# Altium PCB PCB_Arithmetic Logic Unit_2021-10-05.pcbdoc
Units mm, origin at the board's own origin, x right, y up, seen from the top; angles counter-clockwise.
Board outline 236.59 x 324.34 mm, 2 copper layers (Top Layer, Bottom Layer); 59 components, 103 nets, 364 pads, 139 vias.
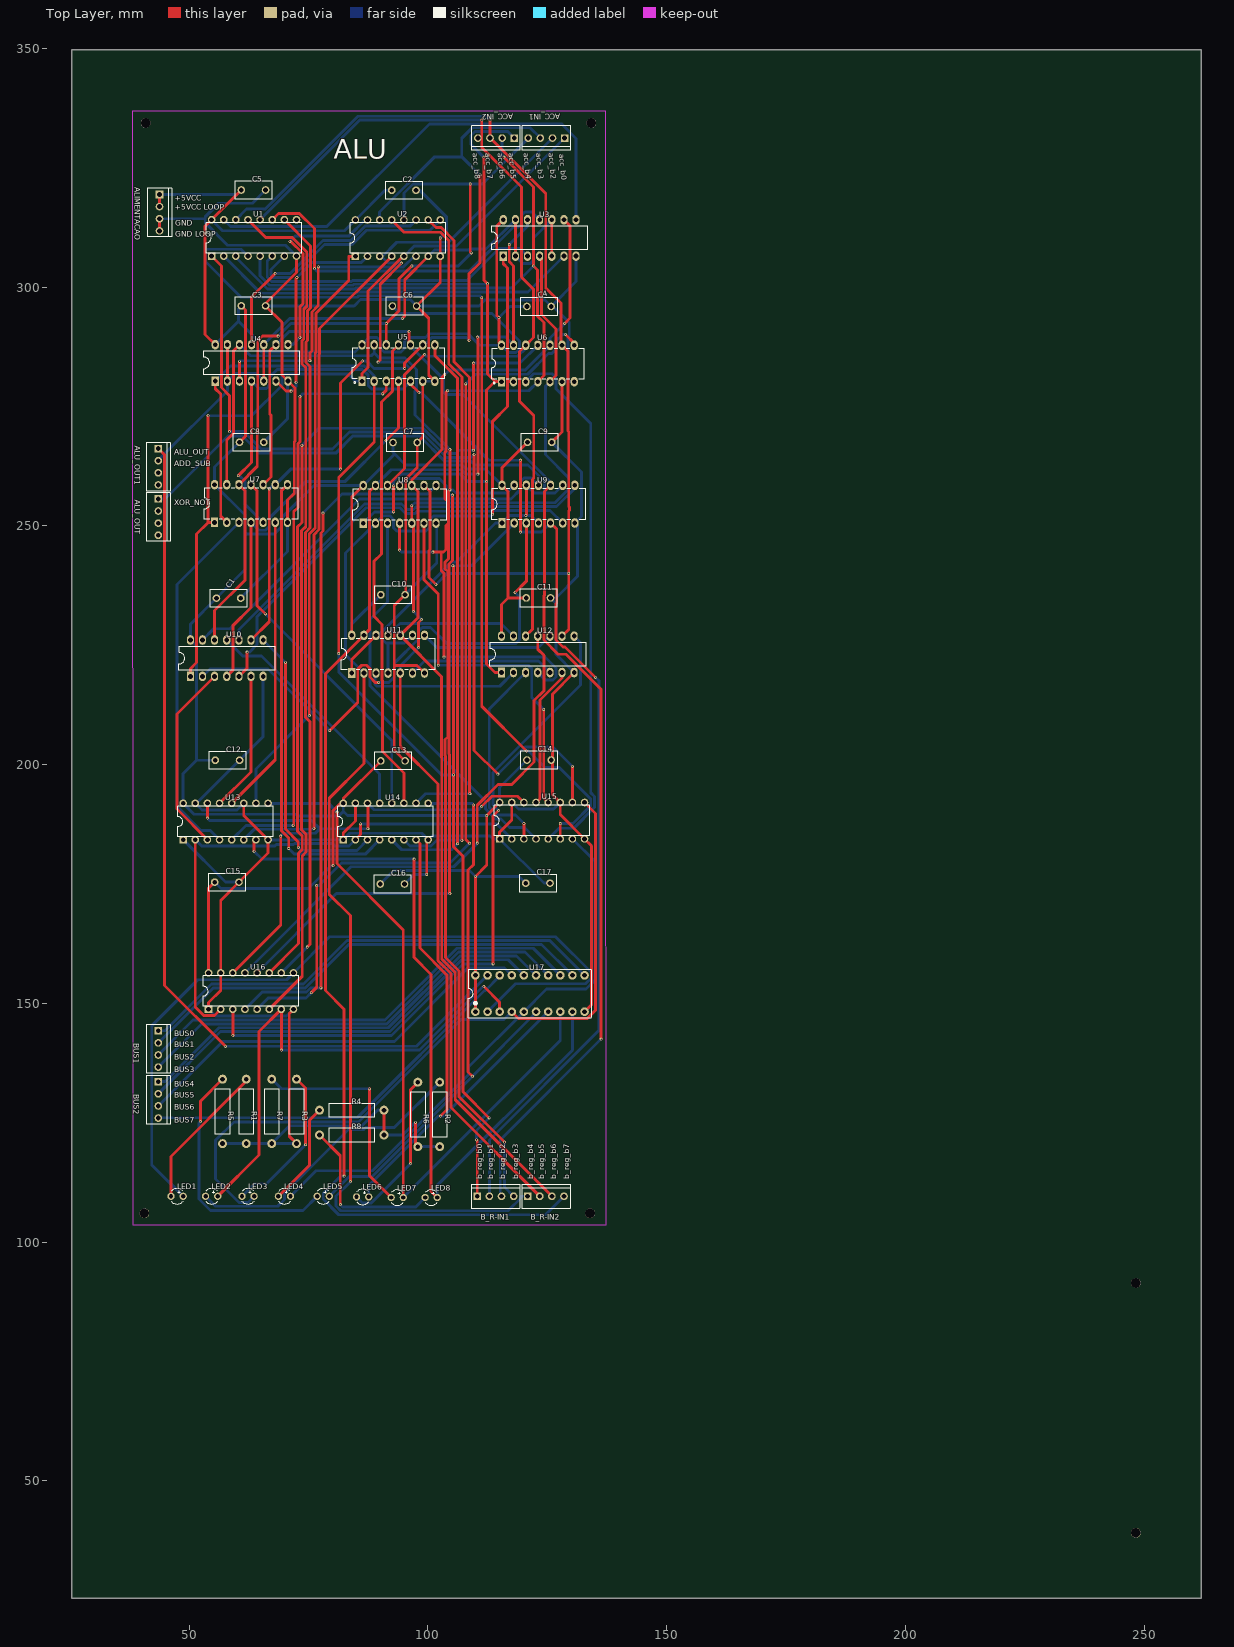
[diagram p0: Top Layer view]
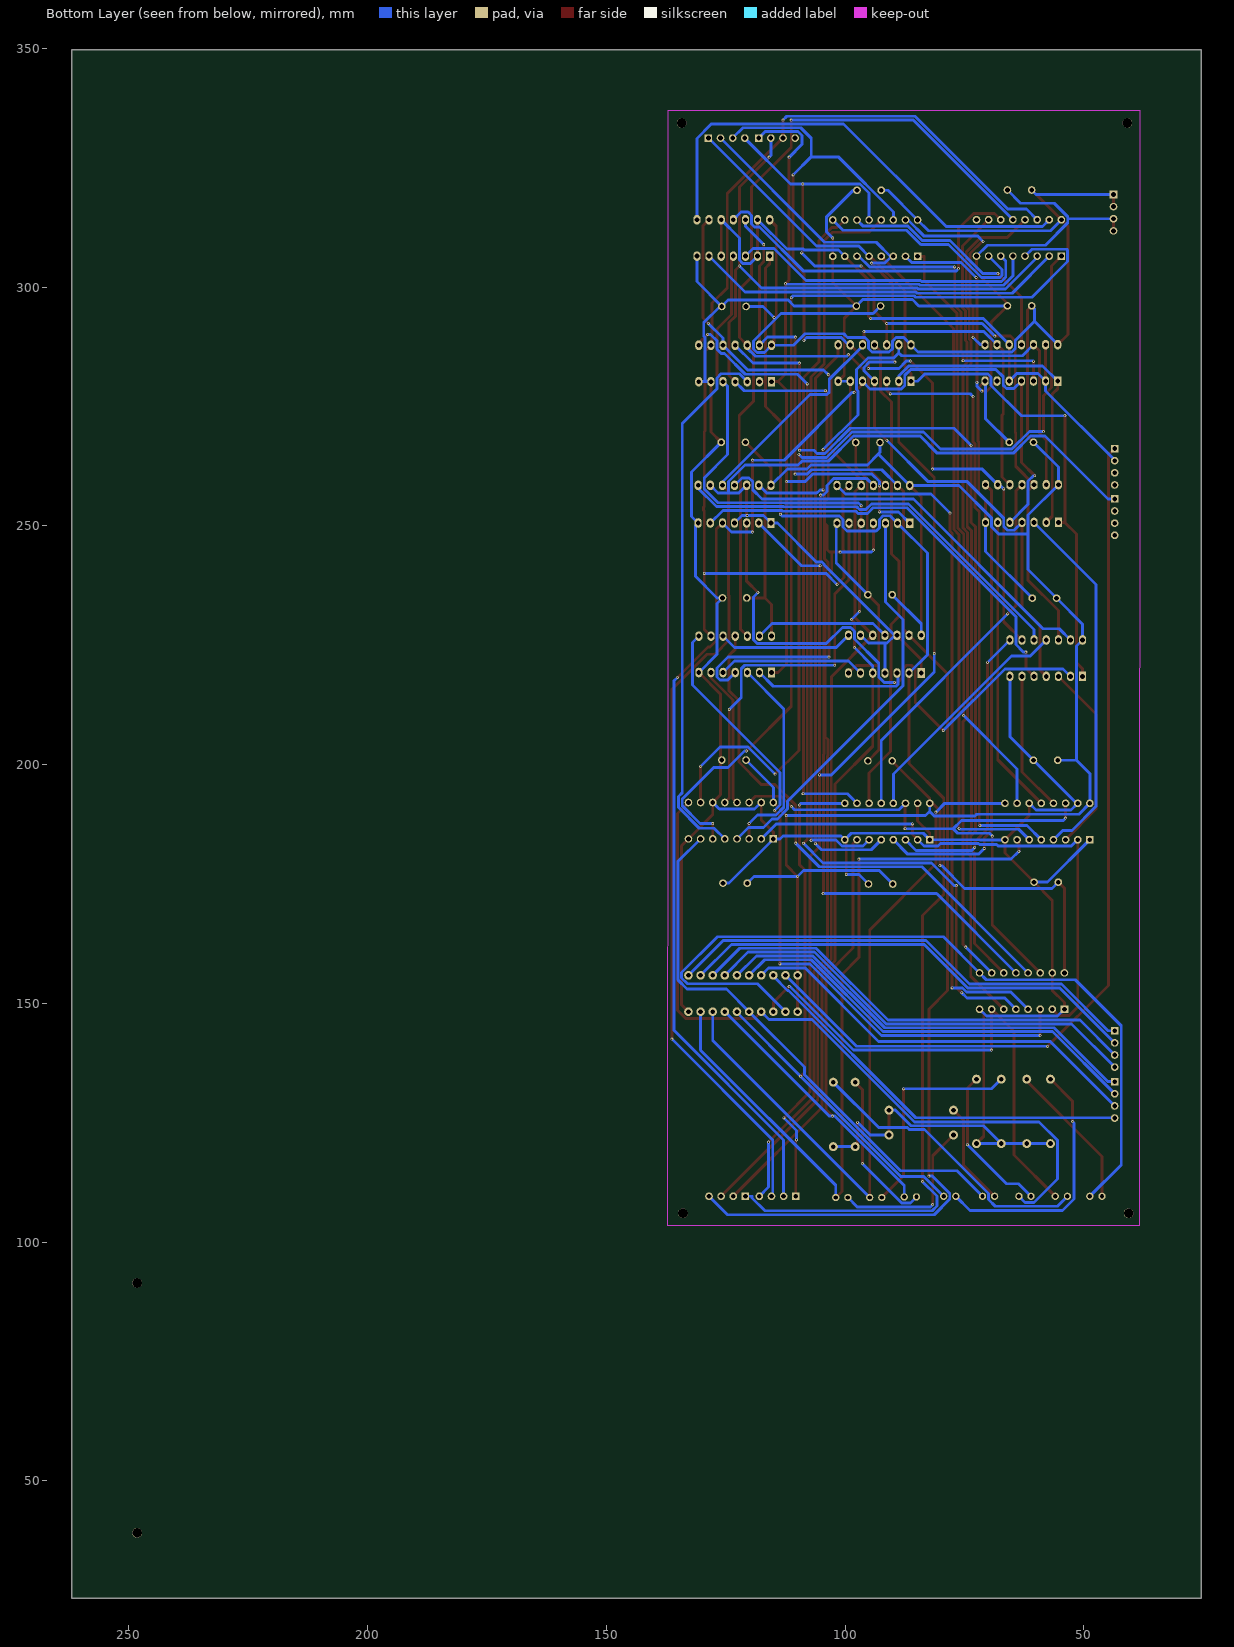
[diagram p1: Bottom Layer view, seen from below]

## Layer stack, top to bottom
Top Layer: signal copper (thickness not stored)
Dielectric: dielectric 0.32, FR-4, Dk 4.8
Bottom Layer: signal copper (thickness not stored)

## Board outline
261.986,25.4 25.4,25.4 25.4,349.735 261.986,349.735

## Components (designator, comment, footprint, x,y, rotation, side; value= is the part's Value field where it differs from the comment)
ACC_IN1 "ACC-IN1" HDR-TH_4P-P2.54-D1.0 124.826,331.216 r180 top
ACC_IN2 "ACC_OUT2" HDR-TH_4P-P2.54-D1.0 114.285,331.216 r180 top
ALIMENTACAO "ALIM." HDR-TH_4P-P2.54-D1.0 43.8,315.595 r270 top
ALU_OUT "ALU_OUT2" HDR-TH_4P-P2.54-D1.0 43.546,251.841 r270 top
ALU_OUT1 "ALU_OUT1" HDR-TH_4P-P2.54-D1.0 43.546,262.382 r270 top
B_R-IN1 "B_R-IN2" HDR-TH_4P-P2.54-D1.0 114.158,109.601 r0 top
B_R-IN2 "ACC_OUT2" HDR-TH_4P-P2.54-D1.0 124.699,109.601 r0 top
BUS1 "BUS1" HDR-TH_4P-P2.54-D1.0 43.546,140.462 r270 top
BUS2 "BUS2" HDR-TH_4P-P2.54-D1.0 43.546,129.794 r270 top
C1 "100nF 63V poli7" CAP-TH_L7.6-W3.8-P5.08-D0.51 58.263,234.869 r0 top
C2 "100nF 63V poli" CAP-TH_L7.6-W3.8-P5.08-D0.51 94.981,320.294 r0 top
C3 "100nF 63V poli" CAP-TH_L7.6-W3.8-P5.08-D0.51 63.47,296.083 r0 top
C4 "100nF 63V poli" CAP-TH_L7.6-W3.8-P5.08-D0.51 123.287,295.956 r0 top
C5 "100nF 63V poli" CAP-TH_L7.6-W3.8-P5.08-D0.51 63.47,320.34 r0 top
C6 "100nF 63V poli" CAP-TH_L7.6-W3.8-P5.08-D0.51 95.108,296.037 r0 top
C7 "100nF 63V poli7" CAP-TH_L7.6-W3.8-P5.08-D0.51 95.235,267.462 r0 top
C8 "100nF 63V poli" CAP-TH_L7.6-W3.8-P5.08-D0.51 63.089,267.508 r0 top
C9 "100nF 63V poli" CAP-TH_L7.6-W3.8-P5.08-D0.51 123.414,267.508 r0 top
C10 "100nF 63V poli" CAP-TH_L7.6-W3.8-P5.08-D0.51 92.695,235.585 r0 top
C11 "100nF 63V poli7" CAP-TH_L7.6-W3.8-P5.08-D0.51 123.145,234.915 r0 top
C12 "100nF 63V poli" CAP-TH_L7.6-W3.8-P5.08-D0.51 58.024,200.914 r0 top
C13 "100nF 63V poli" CAP-TH_L7.6-W3.8-P5.08-D0.51 92.695,200.787 r0 top
C14 "100nF 63V poli" CAP-TH_L7.6-W3.8-P5.08-D0.51 123.287,200.96 r0 top
C15 "100nF 63V poli" CAP-TH_L7.6-W3.8-P5.08-D0.51 57.897,175.387 r0 top
C16 "100nF 63V poli" CAP-TH_L7.6-W3.8-P5.08-D0.51 92.568,175.006 r0 top
C17 "100nF 63V poli" CAP-TH_L7.6-W3.8-P5.08-D0.51 123.033,175.179 r0 top
LED1 "VERDE" LED-TH_BD3.0-P2.54-RD-GREEN 47.483,109.601 r0 top
LED2 "VERDE" LED-TH_BD3.0-P2.54-RD-GREEN 54.722,109.601 r0 top
LED3 "VERDE" LED-TH_BD3.0-P2.54-RD-GREEN 62.342,109.601 r0 top
LED4 "VERDE" LED-TH_BD3.0-P2.54-RD-GREEN 69.962,109.601 r0 top
LED5 "VERDE" LED-TH_BD3.0-P2.54-RD-GREEN 78.09,109.601 r0 top
LED6 "VERDE" LED-TH_BD3.0-P2.54-RD-GREEN 86.345,109.474 r0 top
LED7 "VERDE" LED-TH_BD3.0-P2.54-RD-GREEN 93.584,109.347 r0 top
LED8 "VERDE" LED-TH_BD3.0-P2.54-RD-GREEN 100.696,109.347 r0 top
R1 "470" RES-TH_BD3.0-L9.5-P13.50-D0.6 61.961,127.381 r270 top
R2 "470" RES-TH_BD3.0-L9.5-P13.50-D0.6 102.474,126.746 r270 top
R3 "470" RES-TH_BD3.0-L9.5-P13.50-D0.6 72.502,127.381 r270 top
R4 "470" RES-TH_BD3.0-L9.5-P13.50-D0.6 84.059,127.635 r0 top
R5 "470" RES-TH_BD3.0-L9.5-P13.50-D0.6 57.008,127.381 r270 top
R6 "470" RES-TH_BD3.0-L9.5-P13.50-D0.6 97.902,126.746 r270 top
R7 "470" RES-TH_BD3.0-L9.5-P13.50-D0.6 67.295,127.381 r270 top
R8 "470" RES-TH_BD3.0-L9.5-P13.50-D0.6 84.059,122.428 r0 top
U1 "XD74LS283" DIP-16_L19.8-W6.5-P2.54-LS7.6-BL 63.597,310.307 r0 top
U2 "XD74LS283" DIP-16_L19.8-W6.5-P2.54-LS7.6-BL 93.711,310.261 r0 top
U3 "XD74LS86" DIP-14_L20.0-W7.6-P2.54-LS7.6-BL 123.414,310.307 r0 top
U4 "XD74LS86" DIP-14_L20.0-W7.6-P2.54-LS7.6-BL 63.089,284.145 r0 top
U5 "HD74LS08P" DIP-14_L19.4-W6.4-P2.54-LS7.6-BL 93.838,284.099 r0 top
U6 "HD74LS08P" DIP-14_L19.4-W6.4-P2.54-LS7.6-BL 123.033,284.018 r0 top
U7 "SN74LS32N" PDIP-14_L19.6-W6.5-P2.54-LS7.9-BL 62.962,254.681 r0 top
U8 "SN74LS32N" PDIP-14_L19.6-W6.5-P2.54-LS7.9-BL 94.092,254.508 r0 top
U9 "SN74LS32N" PDIP-14_L19.6-W6.5-P2.54-LS7.9-BL 123.16,254.554 r0 top
U10 "XD74LS86" DIP-14_L20.0-W7.6-P2.54-LS7.6-BL 57.882,222.296 r0 top
U11 "SN74LS32N" PDIP-14_L19.6-W6.5-P2.54-LS7.9-BL 91.679,223.139 r0 top
U12 "XD74LS86" DIP-14_L20.0-W7.6-P2.54-LS7.6-BL 123.018,223.104 r0 top
U13 "74LS153" DIP-16_L19.8-W6.5-P2.54-LS7.6-BL 57.643,188.087 r0 top
U14 "74LS153" DIP-16_L19.8-W6.5-P2.54-LS7.6-BL 91.171,188.087 r0 top
U15 "74LS153" DIP-16_L19.8-W6.5-P2.54-LS7.6-BL 123.922,188.26 r0 top
U16 "74LS153" DIP-16_L19.8-W6.5-P2.54-LS7.6-BL 62.962,152.573 r0 top
U17 "SN74LS245N" DIP-20_L25.5-W10.0-P2.54-LS7.6-BL 121.382,152.065 r0 top

## Footprints (in the part's own frame and the unit in brackets; to place one, negate y for a bottom-side part, rotate by r counter-clockwise, add the part's x,y. Pads: shape width x height; smd on the part's side, far side on the other; paste and mask are expansions set on the pad)
CAP-TH_L7.6-W3.8-P5.08-D0.51 [mm]
  round 1.6 hole 1: 1(-2.54,0) 2(2.54,0)
  silkscreen extent -3.81,-1.91 3.81,1.91
DIP-14_L19.4-W6.4-P2.54-LS7.6-BL [mm]
  rect 1.5x2 hole 1: 1(-7.62,-3.81)
  oval 1.5x2 hole 1: 2(-5.08,-3.81) 3(-2.54,-3.81) 4(0,-3.81) 5(2.54,-3.81) 6(5.08,-3.81) 7(7.62,-3.81) 8(7.62,3.81) 9(5.08,3.81) 10(2.54,3.81) 11(0,3.81) 12(-2.54,3.81) 13(-5.08,3.81) 14(-7.62,3.81)
  silkscreen extent -9.7,-4.24 9.7,3.2
DIP-14_L20.0-W7.6-P2.54-LS7.6-BL [mm]
  rect 1.5x2 hole 1: 1(-7.62,-3.81)
  oval 1.5x2 hole 1: 2(-5.08,-3.81) 3(-2.54,-3.81) 4(0,-3.81) 5(2.54,-3.81) 6(5.08,-3.81) 7(7.62,-3.81) 8(7.62,3.81) 9(5.08,3.81) 10(2.54,3.81) 11(0,3.81) 12(-2.54,3.81) 13(-5.08,3.81) 14(-7.62,3.81)
  silkscreen extent -10.03,-2.53 10,2.54
DIP-16_L19.8-W6.5-P2.54-LS7.6-BL [mm]
  rect 1.6x1.6 hole 1: 1(-8.89,-3.81)
  round 1.6 hole 1: 2(-6.35,-3.81) 3(-3.81,-3.81) 4(-1.27,-3.81) 5(1.27,-3.81) 6(3.81,-3.81) 7(6.35,-3.81) 8(8.89,-3.81) 9(8.89,3.81) 10(6.35,3.81) 11(3.81,3.81) 12(1.27,3.81) 13(-1.27,3.81) 14(-3.81,3.81) 15(-6.35,3.81) 16(-8.89,3.81)
  silkscreen extent -10,-3.2 10,3.2
DIP-20_L25.5-W10.0-P2.54-LS7.6-BL [mm]
  round 1.8 hole 1: 1(-11.43,-3.81) 2(-8.89,-3.81) 3(-6.35,-3.81) 4(-3.81,-3.81) 5(-1.27,-3.81) 6(1.27,-3.81) 7(3.81,-3.81) 8(6.35,-3.81) 9(8.89,-3.81) 10(11.43,-3.81) 11(11.43,3.81) 12(8.89,3.81) 13(6.35,3.81) 14(3.81,3.81) 15(1.27,3.81) 16(-1.27,3.81) 17(-3.81,3.81) 18(-6.35,3.81) 19(-8.89,3.81) 20(-11.43,3.81)
  silkscreen extent -12.95,-5.08 12.83,5.08
HDR-TH_4P-P2.54-D1.0 [mm]
  rect 1.6x1.6 hole 1: 1(-3.81,0)
  round 1.6 hole 1: 2(-1.27,0) 3(1.27,0) 4(3.81,0)
  silkscreen extent -5.08,-2.54 5.08,2.54
LED-TH_BD3.0-P2.54-RD-GREEN [mil]
  round 60 hole 35.43: 1(-50,0) 2(50,0)
  silkscreen extent -50,-64 50,64
PDIP-14_L19.6-W6.5-P2.54-LS7.9-BL [mm]
  rect 1.5x2 hole 1: 1(-7.62,-3.95)
  oval 1.5x2 hole 1: 2(-5.08,-3.95) 3(-2.54,-3.95) 4(0,-3.95) 5(2.54,-3.95) 6(5.08,-3.95) 7(7.62,-3.95) 8(7.62,3.95) 9(5.08,3.95) 10(2.54,3.95) 11(0,3.95) 12(-2.54,3.95) 13(-5.08,3.95) 14(-7.62,3.95)
  silkscreen extent -9.8,-3.3 9.8,3.3
RES-TH_BD3.0-L9.5-P13.50-D0.6 [mm]
  round 1.88 hole 1: 1(-6.75,0) 2(6.75,0)
  silkscreen extent -4.75,-1.5 4.75,1.5

## Free pads (board coordinates)
  round 2.032 hole 2.032 unplated: ""(40.625,106.045) ""(40.894,334.37) ""(133.97,106.045) ""(134.239,334.37) ""(248.27,39.116) ""(248.27,91.44)

## Via types
v1: diameter 0.61, hole 0.305, Top Layer to Bottom Layer, 139 vias

## Nets (pads, with @x,y where several pads share a name; then routed paths per layer and width w, separated by ;. In a path a pad name is that pad's centre, name@x,y a point inside that pad or via, vN(x,y) a via of type N, cw(c..) or ccw(c..) an arc to the next point about the centre after c; other vN are vias at no path point)
+5V: ALIMENTACAO.1 ALIMENTACAO.2 C1.1 C2.1 C3.1 C4.1 C5.1 C6.1 C7.1 C8.1 C9.1 C10.1 C11.1 C12.1 C13.1 C14.1 C15.1 C16.1 C17.1 U1.16 U2.16 U3.14 U4.14 U5.14 U6.14 U7.14 U8.14 U9.14 U10.14 U11.14 U12.14 U13.16 U14.16 U15.16 U16.16 U17.1 U17.20 | length 753.6
  Top Layer w0.6: ALIMENTACAO.2 ALIMENTACAO.1 ; U16.16 54.072,174.102 C15.1 ; U4.14 53.349,290.075 53.349,312.759 U1.16 C5.1 ; C8.1 61.819,268.778 61.819,295.194 C3.1 ; v1(80.147,178.836) 80.147,190.337 81.707,191.897 U14.16 82.281,192.913 C13.1 ; U11.14 84.059,256.045 U8.14 ; U17.1 U17.20 v1(109.952,176.593) 112.331,178.972 v1(112.331,189.325) 112.331,189.369 U15.16 ; U12.14 115.398,233.503 116.81,234.915 ; U6.14 114.887,288.354 v1(114.887,293.642) 114.44,294.089 114.44,312.763 U3.14 ; C11.1 116.81,234.915 ; C9.1 115.54,262.174 U9.14 116.81,257.234 116.81,234.915
  Bottom Layer w0.6: ALIMENTACAO.1 59.995,319.405 C5.1 ; U1.16 57.014,311.809 82.559,311.809 U2.16 91.044,320.294 C2.1 ; C15.1 56.681,174.063 74.975,174.063 79.748,178.836 v1(80.147,178.836) ; U4.14 60.355,292.841 ; C12.1 51.532,200.914 ; C8.1 55.342,262.301 U7.14 61.692,252.281 61.692,248.288 ; C3.1 60.355,295.508 60.355,292.841 ; U14.16 82.281,190.188 ; U11.14 84.059,229.489 C10.1 ; C16.1 92.837,177.815 108.73,177.815 v1(109.952,176.593) 119.079,176.593 C17.1 ; C6.1 94.126,294.478 113.444,294.478 119.205,288.717 119.205,287.059 118.472,286.326 116.915,286.326 U6.14 110.816,287.828 108.395,290.249 100.274,290.249 99.471,289.446 95.858,289.446 95.09,288.678 95.09,287.14 94.357,286.407 90.779,286.407 90.046,287.14 90.046,288.697 89.322,289.421 87.729,289.421 U5.14 84.747,286.438 65.051,286.438 64.359,287.131 64.359,288.837 60.355,292.841 ; C7.1 92.695,265.404 93.056,265.042 ; v1(112.331,189.325) 83.144,189.325 82.281,190.188 ; v1(114.887,293.642) 117.201,295.956 C4.1 ; U15.16 115.032,195.245 C14.1 ; U9.14 112.097,261.947 107.981,261.947 107.179,262.75 95.349,262.75 93.056,265.042 ; 51.532,200.914 51.532,224.836 U10.14 50.262,229.408 C1.1 61.692,240.838 61.692,248.288 ; 51.532,200.914 48.753,198.135 U13.16 51.032,189.618 72.431,189.618 72.815,189.234 81.326,189.234 82.281,190.188 ; 61.692,248.288 67.833,248.288 69.312,249.766 69.312,251.608 76.161,258.458 U8.14 93.056,265.042
GND: ALIMENTACAO.3 ALIMENTACAO.4 C1.2 C2.2 C3.2 C4.2 C5.2 C6.2 C7.2 C8.2 C9.2 C10.2 C11.2 C12.2 C13.2 C14.2 C15.2 C16.2 C17.2 R1.2 R2.2 R3.2 R4.2 R5.2 R6.2 R7.2 R8.2 U1.8 U2.8 U3.7 U4.7 U5.6 U5.7 U6.6 U6.7 U7.7 U8.7 U9.7 U10.7 U11.7 U12.7 U13.1 U13.8 U13.11 U13.15 U14.1 U14.8 U14.15 U15.1 U15.8 U15.11 U15.15 U16.1 U16.8 U16.15 U17.10 | length 875.3
  Top Layer w0.6: ALIMENTACAO.4 ALIMENTACAO.3 ; U16.1 54.072,150.165 56.612,152.705 U16.15 56.612,171.562 C15.2 66.533,181.483 U13.8 61.453,189.357 U13.11 ; U7.7 70.582,255.391 72.004,256.814 72.004,267.544 72.187,267.726 72.187,278.857 U4.7 69.447,281.597 69.447,289.387 69.463,289.404 69.463,292.629 C3.2 66.01,296.595 72.487,303.072 U1.8 ; U16.8 70.964,147.875 70.964,122.168 R3.2@72.502,120.631 ; U14.1 82.281,185.679 84.821,188.219 U14.15 ; R8.2@90.809,122.428 R4.2@90.809,127.635 ; C13.2 92.949,203.073 92.949,220.746 ; v1(97.409,125.088) 97.41,120.488 R6.2@97.902,119.996 ; U5.6 98.936,280.271 98.936,268.623 C7.2 97.775,262.231 95.362,259.818 95.362,235.712 C10.2 92.949,233.299 92.949,220.746 ; U11.7 97.742,220.746 92.949,220.746 ; v1(99.758,177.008) 99.758,183.974 U14.8 ; U5.7 100.188,281.559 100.188,293.497 C6.2 102.601,300.99 U2.8 v1(102.601,310.295) ; U15.1 115.032,185.852 117.572,188.392 U15.15 ; C14.2 C14.2@126.092,200.96 ; C9.2 128.113,269.667 U6.6 ; U12.7 126.092,214.749 C14.2@126.092,200.96 ; U17.10 134.267,149.71 134.267,182.995 U15.8 127.732,189.53 U15.11 126.092,193.709 C14.2@126.092,200.96
  Bottom Layer w0.6: ALIMENTACAO.3 53.368,314.325 ; U13.1 57.643,175.387 C15.2 ; U16.1 55.509,147.326 70.414,147.326 U16.8 ; R5.2@57.008,120.631 61.961,120.631 R7.2@67.295,120.631 ; C1.2 70.582,244.648 U7.7 ; U13.11 60.061,190.506 52.684,190.506 U13.15 51.547,191.897 C12.2 65.502,205.852 U10.7 ; C8.2 70.572,272.451 70.572,280.198 U4.7 ; C3.2 84.566,296.083 85.871,297.388 96.297,297.388 C6.2 110.676,296.037 111.913,297.274 124.509,297.274 C4.2 ; C5.2 63.243,317.573 56.21,317.573 53.368,314.731 53.368,314.325 ; U13.8 66.577,184.233 71.737,184.233 71.787,184.282 80.874,184.282 80.879,184.277 U14.1 83.624,185.62 98.718,185.62 U14.8 100.836,185.052 113.028,185.052 113.63,184.45 U15.1 124.303,175.179 C17.2 ; U1.8 70.207,308.777 58.062,308.777 53.368,313.471 53.368,314.325 ; R3.2@72.502,120.631 R7.2@67.295,120.631 ; R8.2@90.809,122.428 94.749,122.428 v1(97.409,125.088) ; R4.2@90.809,127.635 89.484,127.635 86.227,124.378 71.042,124.378 R7.2@67.295,120.631 ; C16.2 97.11,177.008 v1(99.758,177.008) ; C10.2 101.85,242.2 101.85,250.42 U8.7 ; C2.2 98.292,320.294 103.938,314.648 103.938,311.632 v1(102.601,310.295) ; R6.2@97.902,119.996 R2.2@102.474,119.996 ; U5.6 U5.7 ; U15.15 118.955,190.686 126.348,190.686 U15.11 ; C9.2 132.143,261.319 132.143,251.967 U9.7 131.347,250.037 131.347,239.442 126.82,234.915 C11.2 126.828,233.772 126.828,223.104 U12.7 ; U6.6 129.383,280.208 ; U6.7 129.383,280.208 ; U3.7 131.034,301.163 C4.2 ; C4.2 126.24,295.956 129.613,292.583 129.613,289.771 129.383,289.541 129.383,280.208
LED1_1: LED1.1 R1.1 | length 31.1
  Top Layer w0.6: LED1.1 46.213,117.966 61.961,133.714 R1.1
LED2_1: LED2.1 R2.1 | length 61.4
  Bottom Layer w0.6: LED2.1 55.542,107.51 68.559,107.51 69.962,108.913 69.962,110.163 83.374,123.575 86.559,123.575 86.96,123.976 92.954,123.976 R2.1
LED3_1: LED3.1 R3.1 | length 32.3
  Top Layer w0.6: R3.1 74.385,132.248 v1(74.385,120.403)
  Bottom Layer w0.6: LED3.1 63.685,112.215 66.197,112.215 v1(74.385,120.403)
LED4_1: LED4.1 R4.1 | length 21.6
  Top Layer w0.6: LED4.1 75.192,116.101 75.192,125.518 R4.1@77.309,127.635
R5_1: LED5.1 R5.1 | length 54.2
  Top Layer w0.6: v1(52.347,125.242) 52.347,129.47 R5.1
  Bottom Layer w0.6: v1(52.347,125.242) 52.057,124.951 52.057,109.02 54.478,106.599 73.818,106.599 LED5.1
R6_1: LED6.1 R6.1 | length 32.9
  Top Layer w0.6: v1(96.399,116.455) 96.399,131.993 R6.1
  Bottom Layer w0.6: LED6.1 86.34,108.209 88.153,108.209 v1(96.399,116.455)
R7_1: LED7.1 R7.1 | length 45.9
  Top Layer w0.6: v1(87.75,132.11) 87.75,113.911 LED7.1
  Bottom Layer w0.6: R7.1 69.315,132.11 v1(87.75,132.11)
R8_1: LED8.1 R8.1 | length 35.1
  Top Layer w0.6: R8.1@77.309,122.428 81.663,118.074 v1(81.662,107.861)
  Bottom Layer w0.6: v1(81.662,107.861) 82.142,107.382 97.461,107.382 LED8.1
S$31: 
S$33: 
S$35: 
U1_1: U1.1 U15.10 | length 191.2
  Top Layer w0.6: U1.1 56.748,304.456 56.748,278.966 58.458,277.256 v1(58.458,269.747) ; v1(109.685,264.984) 109.681,264.98 109.681,202.994 v1(114.661,198.014) ; U15.10 v1(130.272,199.617)
  Bottom Layer w0.6: v1(58.458,269.747) 61.417,269.747 65.094,266.071 80.002,266.071 83.569,269.637 98.587,269.637 103.868,264.356 109.057,264.356 v1(109.685,264.984) ; v1(114.661,198.014) 120.33,203.684 126.205,203.684 v1(130.272,199.617)
U1_2: U1.2 U3.6 | length 77.7
  Bottom Layer w0.6: U1.2 65.011,298.732 84.945,298.732 85.207,298.994 120.991,298.994 U3.6
U1_3: ACC_IN2.2 U1.3 U6.4 U8.4 U12.4 | length 245.2
  Top Layer w0.6: v1(94.092,244.934) U8.4 ; v1(101.042,244.511) 102.808,244.511 ; v1(103.376,222.53) 103.376,240.088 102.808,240.656 102.808,244.511 ; v1(104.125,278.308) 103.795,277.977 103.795,265.637 103.538,265.38 103.538,255.778 104.308,255.008 104.308,250.586 103.801,250.079 103.801,245.045 103.266,244.511 102.808,244.511 ; v1(115.918,327.215) 122.144,320.99 v1(122.143,304.428) 122.98,303.591 122.98,293.901 124.303,292.578 124.303,281.478 U6.4
  Bottom Layer w0.6: U1.3 59.787,306.213 66.396,299.604 84.682,299.604 84.875,299.797 117.513,299.797 v1(122.143,304.428) ; v1(94.092,244.934) 94.516,244.511 v1(101.042,244.511) ; v1(103.376,222.53) 124.561,222.53 126.828,220.263 126.828,218.355 126.213,217.74 124.572,217.74 U12.4 ; v1(104.125,278.308) 121.132,278.308 U6.4 ; ACC_IN2.2 115.555,327.579 v1(115.918,327.215)
U1_4: U1.4 U15.6 | length 202.2
  Top Layer w0.6: v1(111.279,297.781) 111.287,297.774 111.287,263.815 111.279,263.808 111.279,261.204 111.295,261.188 111.295,212.223 v1(120.664,202.854) ; U15.6 v1(127.732,187.651)
  Bottom Layer w0.6: U1.4 60.888,307.936 53.571,307.936 53.404,307.769 53.404,305.354 60.864,297.894 85.242,297.894 85.539,298.191 110.87,298.191 v1(111.279,297.781) ; v1(120.664,202.854) 121.056,202.854 124.524,199.386 127.51,199.386 134.125,192.77 134.125,191.399 130.377,187.651 v1(127.732,187.651)
U1_5: ACC_IN2.1 U1.5 U6.1 U8.1 U12.1 | length 215.9
  Top Layer w0.6: v1(92.822,252.921) v1(92.822,258.382) ; v1(111.72,327.216) 111.72,301.488 v1(112.484,300.723) 112.484,281.785 114.061,280.208 ; U12.1 114.046,219.294 112.29,221.05 v1(112.29,259.26) 112.29,278.437 114.061,280.208 ; U6.1 114.061,280.208
  Bottom Layer w0.6: U1.5 64.867,302.369 66.829,300.407 84.35,300.407 84.542,300.6 112.361,300.6 v1(112.484,300.723) ; U8.1 88.835,252.921 v1(92.822,252.921) ; v1(92.822,258.382) 92.822,259.302 94.414,260.894 106.764,260.894 108.398,259.26 v1(112.29,259.26) ; v1(111.72,327.216) 109.022,329.913 109.022,331.737 109.85,332.564 116.747,332.564 ACC_IN2.1
U1_6: U1.6 U3.3 | length 63.2
  Bottom Layer w0.6: U1.6 66.368,305.458 66.368,302.097 67.255,301.21 84.017,301.21 84.21,301.402 108.2,301.402 114.906,308.108 119.262,308.108 U3.3
U1_7: U1.7 U2.9 | length 45.8
  Bottom Layer w0.6: U1.7 67.171,303.721 67.171,302.44 67.598,302.013 71.428,302.013 78.34,308.925 84.148,308.925 87.127,311.903 100.433,311.903 U2.9
U1_9: U1.9
U1_10: U1.10 U16.10 | length 164.1
  Top Layer w0.6: U1.10 75.448,308.615 75.448,295.674 74.818,295.044 74.818,288.799 74.47,288.451 74.47,284.242 75.335,283.377 75.335,249.615 74.362,248.641 74.362,209.936 75.309,208.989 75.309,162.38 v1(74.732,161.803)
  Bottom Layer w0.6: U16.10 v1(74.732,161.803)
U1_11: U1.11 U3.11 | length 73.2
  Top Layer w0.6: U1.11 68.745,315.455 73.057,315.455 76.251,312.261 76.251,303.882 v1(76.256,303.878)
  Bottom Layer w0.6: v1(76.256,303.878) 76.717,303.416 108.769,303.416 117.966,312.613 118.99,312.613 119.604,313.227 119.604,315.006 120.307,315.709 121.822,315.709 U3.11
U1_12: ACC_IN2.4 U1.12 U6.12 U8.12 U12.12 | length 224.8
  Top Layer w0.6: U8.12 95.108,262.014 95.108,281.654 v1(99.318,285.865) ; ACC_IN2.4 111.294,331.216 ; v1(111.294,334.977) 111.294,331.216 ; U12.12 121.907,228.343 121.907,259.737 122.176,260.006 122.176,273.143 119.205,276.114 119.205,286.54 U6.12 122.123,289.459 122.123,299.568 119.604,302.088 119.604,320.952 111.294,329.261 111.294,331.216
  Bottom Layer w0.6: U1.12 85.723,334.973 111.29,334.973 v1(111.294,334.977) ; v1(99.318,285.865) 99.66,285.523 118.804,285.523 120.493,287.212 U6.12
U1_13: U1.13 U16.6 | length 178.4
  Top Layer w0.6: U1.13 66.052,310.392 71.605,310.392 74.646,307.351 74.646,296.006 74.015,295.376 74.015,289.131 73.667,288.783 73.667,283.91 74.422,283.156 74.422,249.836 73.559,248.973 73.559,186.356 74.506,185.408 74.506,181.696 73.703,180.893 73.703,155.695 U16.6
U1_14: ACC_IN2.3 U1.14 U6.9 U8.9 U12.9 | length 228.9
  Top Layer w0.6: U8.9 100.459,257.17 100.459,245.069 100.235,244.845 100.235,239.208 v1(101.695,237.749) ; v1(113.015,334.977) ACC_IN2.3 113.059,331.216 124.684,319.591 124.684,299.829 127.847,296.665 127.847,288.093 U6.9 129.365,286.576 129.365,269.839 129.51,269.694 129.51,254.095 129.65,253.955 129.65,253.286 129.51,253.147 v1(129.51,240.067) 129.51,228.326 U12.9
  Bottom Layer w0.6: U1.14 62.001,316.331 65.945,316.331 85.39,335.776 112.216,335.776 v1(113.015,334.977) ; v1(101.695,237.749) 104.012,240.067 v1(129.51,240.067)
U1_15: U1.15 U3.8 | length 101.6
  Bottom Layer w0.6: U1.15 58.683,312.681 78.827,312.681 100.316,334.17 128.025,334.17 131.034,331.162 U3.8
U2_1: U2.1 U13.10 | length 124
  Top Layer w0.6: v1(75.169,210.27) 75.169,248.313 76.427,249.571 76.427,286.207 76.536,286.316 76.536,294.492 83.419,301.375 83.419,306.451 U2.1
  Bottom Layer w0.6: U13.10 63.993,199.094 v1(75.169,210.27)
U2_2: U2.2 U4.6 | length 45
  Top Layer w0.6: U4.6 70.269,278.235 v1(71.379,278.235) ; v1(72.401,280.072) 72.401,301.844 v1(72.574,302.017)
  Bottom Layer w0.6: v1(71.379,278.235) 72.401,279.257 v1(72.401,280.072) ; v1(72.574,302.017) 75.705,305.149 86.059,305.149 U2.2
U2_3: ACC_IN1.2 U2.3 U5.4 U7.4 U10.4 | length 170.2
  Top Layer w0.6: U10.4 59.152,219.756 59.152,229.087 62.962,232.897 U7.4 ; v1(89.568,284.292) 90.028,284.752 90.028,300.59 v1(94.464,305.026) ; v1(91.239,267.902) 93.838,270.501 U5.4
  Bottom Layer w0.6: U7.4 64.602,249.091 65.977,249.091 66.772,249.886 66.772,251.613 74.42,259.261 82.597,259.261 v1(91.239,267.902) ; v1(89.568,284.292) 94.955,284.292 96.044,283.202 96.044,282.495 U5.4 ; U2.3 90.28,306.451 U2.3@90.403,306.328 ; v1(94.464,305.026) 91.705,305.026 U2.3@90.403,306.328 ; ACC_IN1.2 104.288,309.408 93.483,309.408 U2.3@90.403,306.328
U2_4: U2.4 U13.6 | length 142.2
  Top Layer w0.6: v1(76.123,186.641) 76.123,248.132 77.23,249.239 77.23,285.875 77.339,285.984 77.339,291.349 U2.4
  Bottom Layer w0.6: U13.6 63.633,186.457 75.939,186.457 v1(76.123,186.641)
U2_5: ACC_IN1.1 U2.5 U5.1 U7.1 U10.1 | length 168.9
  Top Layer w0.6: U10.1 50.262,220.087 51.532,221.357 51.532,248.272 53.99,250.731 ; v1(53.99,273.075) 53.99,250.731 ; U7.1 53.99,250.731 ; U5.1 86.218,281.89 87.48,283.153 87.48,299.183 94.748,306.451 U2.5
  Bottom Layer w0.6: v1(53.99,273.075) 63.091,273.075 69.439,279.423 69.439,281.195 70.082,281.838 83.317,281.838 84.866,280.289 U5.1 ; U2.5 97.135,308.605 106.025,308.605 ACC_IN1.1
U2_6: U2.6 U4.3 | length 60.7
  Top Layer w0.6: U4.3 60.553,280.339 v1(60.553,284.434) ; v1(75.277,284.577) 75.277,286.192 75.733,286.649 75.733,294.824 77.054,296.145 77.054,304.237 v1(77.059,304.241)
  Bottom Layer w0.6: v1(60.553,284.434) 60.695,284.576 v1(75.277,284.577) ; v1(77.059,304.241) 77.081,304.219 94.846,304.219 97.078,306.451 U2.6
U2_7: ALU_OUT1.2 U2.7 U3.2 U3.5 U3.10 U3.13 U4.2 U4.5 U4.10 U4.13 | length 144.8
  Top Layer w0.6: U4.2 U4.13 ; U4.5 U4.10 ; v1(94.681,293.468) 95.168,293.955 95.168,301.558 U2.7 ; U3.2 U3.13 ; U3.5 U3.10
  Bottom Layer w0.6: ALU_OUT1.2 43.546,263.772 58.009,278.235 U4.2 59.585,281.912 64.052,281.912 U4.5 ; U4.10 71.142,293.468 v1(94.681,293.468) ; U2.7 101.412,307.802 108.598,307.802 108.763,307.967 112.184,307.967 U3.13 ; U3.2 119.865,304.966 121.453,304.966 122.144,305.656 122.144,310.307 U3.10
U2_10: U2.10 U14.10 | length 136.6
  Top Layer w0.6: U2.10 101.675,312.456 102.811,312.456 105.466,309.801 105.466,284.381 108.748,281.099 108.748,266.17 108.743,266.165 108.743,193.976 v1(108.811,193.909)
  Bottom Layer w0.6: U14.10 99.532,193.909 v1(108.811,193.909)
U2_11: U2.11 U4.11 | length 51.1
  Top Layer w0.6: U4.11 63.089,297.917 v1(67.992,302.82)
  Bottom Layer w0.6: v1(67.992,302.82) 71.1,302.82 78.03,309.75 83.839,309.75 86.857,312.768 96.218,312.768 U2.11
U2_12: ACC_IN1.4 U2.12 U5.12 U7.12 U10.12 | length 179.2
  Top Layer w0.6: U10.12 55.342,232.279 61.692,238.629 61.692,257.361 U7.12 64.267,262.476 64.267,269.456 64.376,269.565 64.376,288.729 65.386,289.738 v1(68.656,289.738) ; U5.12 v1(91.298,292.382) 93.964,295.048 93.964,301.756 v1(96.635,304.427) ; v1(108.867,321.597) 108.867,307.39 v1(109.097,307.16)
  Bottom Layer w0.6: v1(68.656,289.738) 71.3,292.382 v1(91.298,292.382) ; U2.12 94.981,319.703 96.874,321.596 v1(108.867,321.597) 111.44,321.596 121.016,331.172 ACC_IN1.4 ; v1(96.635,304.427) 106.364,304.427 v1(109.097,307.16)
U2_13: U2.13 U14.6 | length 153.7
  Top Layer w0.6: U2.13 95.013,311.498 102.633,311.498 104.379,309.752 104.379,283.902 107.117,281.164 v1(107.117,184.125)
  Bottom Layer w0.6: U14.6 96.283,182.974 100.625,182.974 101.9,184.249 106.992,184.249 v1(107.117,184.125)
U2_14: ACC_IN1.3 U2.14 U5.9 U7.9 U10.9 | length 187.8
  Top Layer w0.6: U10.9 66.773,229.917 v1(66.773,257.74) ; v1(81.716,261.878) 81.716,279.944 v1(86.301,284.528) ; v1(95.141,282.964) 95.141,284.132 U5.9 ; v1@108.645,288.858 108.645,302.813 110.894,305.062 v1(110.894,323.497)
  Bottom Layer w0.6: v1(66.773,257.74) 67.664,258.631 U7.9 71.289,261.878 v1(81.716,261.878) ; v1(86.301,284.528) 87.187,284.528 88.751,282.964 v1(95.141,282.964) ; U2.14 89.901,315.758 101.434,327.291 107.1,327.291 ; U5.9 99.271,287.909 100.808,289.446 108.056,289.446 v1@108.645,288.858 ; v1(110.894,323.497) 107.1,327.291 ; ACC_IN1.3 121.405,333.367 109.28,333.367 107.1,331.187 107.1,327.291
  other v1: 108.645,288.858
U2_15: U2.15 U4.8 | length 42.9
  Top Layer w0.6: v1(71.106,309.584) 71.277,309.584 73.843,307.018 73.843,296.539 73.208,295.904 v1(73.208,289.465)
  Bottom Layer w0.6: U4.8 71.698,287.955 v1(73.208,289.465) ; v1(71.106,309.584) 72.194,310.672 83.425,310.672 86.823,314.071 U2.15
U3_1: B_R-IN2.1 U3.1 U6.2 U8.2 U11.2 | length 282.2
  Top Layer w0.6: v1(83.763,112.662) 83.763,168.401 79.339,172.825 79.339,192.968 86.599,200.228 U11.2 ; v1(113.574,252.431) 113.574,271.904 116.683,275.013 116.683,280.208 ; U3.1 115.794,304.895 116.683,304.006 116.683,280.208 ; U6.2 116.683,280.208
  Bottom Layer w0.6: v1(83.763,112.662) 80.757,109.656 80.757,107.561 81.739,106.579 116.815,106.579 119.487,109.251 119.487,109.601 B_R-IN2.1 ; U11.2 82.765,223.023 82.765,244.311 U8.2 90.572,252.118 92.063,252.118 92.822,251.359 92.822,249.598 93.501,248.918 99.594,248.918 100.442,249.766 100.442,251.331 101.17,252.06 113.203,252.06 v1(113.574,252.431)
U3_4: B_R-IN2.2 U3.4 U6.5 U8.5 U11.5 | length 246.9
  Top Layer w0.6: U11.5 94.219,203.856 102.117,195.958 102.117,158.945 104.824,156.238 104.824,128.206 B_R-IN2.2 ; v1(96.632,254.217) U8.5 96.985,250.205 v1(96.985,232.038) ; v1(98.046,224.503) 98.046,229.766 v1(98.652,230.371) ; U3.4 123.783,306.128 123.783,294.278 126.843,291.218 126.843,281.478 U6.5
  Bottom Layer w0.6: U11.5 94.219,220.675 v1(98.046,224.503) ; v1(96.632,254.217) 97.228,254.813 112.544,254.813 112.575,254.844 126.623,254.844 129.51,257.731 129.51,260.03 124.607,264.933 124.607,279.242 U6.5 ; v1(96.985,232.038) v1(98.652,230.371)
U3_9: B_R-IN2.3 U3.9 U6.10 U8.10 U11.10 | length 243.3
  Top Layer w0.6: v1(103.538,281.68) 102.992,281.134 102.992,265.969 96.632,259.609 U8.10 97.902,257.188 97.902,230.772 U11.10 102.817,218.491 102.817,201.569 102.92,201.466 102.92,159.277 105.735,156.462 105.735,129.834 B_R-IN2.3 ; U3.9 129.764,312.847 129.764,293.509 v1(128.655,292.4)
  Bottom Layer w0.6: v1(103.538,281.68) 104.519,282.661 120.406,282.661 U6.10 125.573,289.318 v1(128.655,292.4)
U3_12: B_R-IN2.4 U3.12 U6.13 U8.13 U11.13 | length 299.5
  Top Layer w0.6: v1(82.47,113.823) 82.47,148.787 78.536,152.721 78.536,219.026 U11.13 87.742,228.232 87.742,257.188 U8.13 ; v1@110.373,289.549 110.484,289.438 110.484,260.858 v1(110.488,260.854) ; v1(117.046,308.92) 117.046,305.336 117.953,304.43 U6.13
  Bottom Layer w0.6: v1(82.47,113.823) 81.759,113.823 78.09,110.154 78.09,109.003 81.348,105.744 124.652,105.744 B_R-IN2.4 ; U8.13 92.318,261.764 107.029,261.764 107.94,260.854 v1(110.488,260.854) ; v1@110.373,289.549 116.232,289.549 U6.13 ; v1(117.046,308.92) 120.874,312.748 U3.12
  other v1: 110.373,289.549
U4_1: B_R-IN1.1 U4.1 U5.2 U7.2 U9.2 | length 317.1
  Top Layer w0.6: U4.1 55.469,278.733 56.612,277.59 56.612,252.001 U7.2 ; v1(81.336,223.255) 81.336,260.127 88.758,267.549 U5.2 ; v1@105.221,241.654 105.369,241.506 v1(105.369,197.849) 105.369,182.789 107.346,180.812 107.346,131.485 v1(112.82,126.011) ; v1(110.182,121.418) 110.348,121.253 B_R-IN1.1
  Bottom Layer w0.6: U4.1 58.651,283.518 86.664,283.518 88.758,281.424 U5.2 ; v1(81.336,223.255) 81.336,219.416 102.903,197.849 v1(105.369,197.849) ; v1@105.221,241.654 109.13,241.654 U9.2 ; v1(110.182,121.418) 110.182,123.374 v1(112.82,126.011)
  other v1: 105.221,241.654
U4_4: B_R-IN1.2 U4.4 U5.5 U7.5 U9.5 | length 280.8
  Top Layer w0.6: v1(60.287,260.506) 63.089,263.308 U4.4 ; U5.5 96.378,279.677 v1(98.128,277.927) ; v1(119.367,248.697) v1@119.367,263.757 ; U9.5 126.987,249.316 126.987,233.93 126.828,233.77 126.828,226.105 128.267,224.666 128.748,224.666 v1(135.136,218.278)
  Bottom Layer w0.6: v1(60.287,260.506) 60.57,260.506 61.692,259.384 61.692,254.541 U7.5 ; U4.4 64.681,278.743 66.196,278.743 66.899,279.446 66.899,281.217 68.397,282.715 86.332,282.715 87.505,281.541 87.505,279.406 88.238,278.673 94.762,278.673 U5.5 ; v1(98.128,277.927) 98.596,277.927 112.766,263.757 v1@119.367,263.757 ; B_R-IN1.2 112.888,121.404 135.843,144.359 135.843,217.571 v1(135.136,218.278) ; v1(119.367,248.697) 123.793,248.697 U9.5
  other v1: 119.367,263.757
U4_9: B_R-IN1.3 U4.9 U5.10 U7.10 U9.10 | length 270.5
  Top Layer w0.6: U7.10 67.121,260.25 67.121,273.208 66.899,273.43 66.899,286.685 U4.9 ; v1(96.07,290.672) 96.07,288.216 U5.10 ; U9.10 124.412,257.216 124.412,235.484 124.288,235.36 124.288,226.07 127.237,223.121 128.96,223.121 136.285,215.797 v1(136.285,142.531)
  Bottom Layer w0.6: U4.9 70.886,290.672 v1(96.07,290.672) ; U5.10 96.378,287.636 103.318,280.696 103.318,277.974 103.792,277.5 107.368,277.5 125.7,259.169 U9.10 ; B_R-IN1.3 115.149,109.88 115.149,121.395 v1(136.285,142.531)
U4_12: B_R-IN1.4 U4.12 U5.13 U7.13 U9.13 | length 269.4
  Top Layer w0.6: U7.13 57.882,267.982 59.289,269.389 59.289,286.695 U4.12 ; v1(104.607,265.966) v1(104.607,257.545) 104.35,257.288 104.35,243.126 103.62,242.396 103.62,240.979 104.183,240.416 104.183,205.796 103.62,205.232 103.62,201.91 103.723,201.807 103.723,159.61 106.538,156.794 106.538,130.461 v1(116.051,120.948)
  Bottom Layer w0.6: U4.12 62.868,285.635 88.156,285.635 88.758,286.238 ; U5.13 88.758,286.238 ; v1(104.607,257.545) 105.272,257.545 105.961,256.855 116.431,256.855 U9.13 ; v1(104.607,265.966) 97.321,273.252 97.321,278.261 97.648,278.587 97.648,282.734 95.206,285.175 89.82,285.175 88.758,286.238 ; v1(116.051,120.948) 116.051,111.518 B_R-IN1.4
U5_3: U5.3 U13.5 | length 125
  Top Layer w0.6: v1(71.796,187.265) 71.914,187.383 71.914,252.98 72.807,253.873 72.807,267.212 73.211,267.616 v1(73.211,277.08) ; v1(90.552,277.663) 91.298,278.408 U5.3
  Bottom Layer w0.6: U13.5 61.9,187.265 v1(71.796,187.265) ; v1(73.211,277.08) 73.794,277.663 v1(90.552,277.663)
U5_8: U5.8 U14.5 | length 121.6
  Top Layer w0.6: U5.8 101.458,285.687 106.213,280.933 v1(106.213,183.439)
  Bottom Layer w0.6: U14.5 94.546,182.172 104.945,182.172 v1(106.213,183.439)
U5_11: U5.11 U14.11 | length 100.7
  Top Layer w0.6: U5.11 92.568,286.639 92.568,278.214 90.282,275.928 90.282,244.137 88.726,242.581 88.726,231.061 90.409,229.378 90.409,217.668 90.509,217.568 90.509,202.719 94.981,198.247 U14.11
U6_3: U6.3 U15.5 | length 113.1
  Bottom Layer w0.6: U6.3 122.133,281.848 125.995,281.848 126.843,281 126.843,278.706 134.125,271.424 134.125,194.106 134.928,193.303 134.928,191.067 130.551,186.69 127.432,186.69 U15.5
U6_8: U6.8 U16.5 | length 197.2
  Top Layer w0.6: v1(75.574,152.227) 76.716,153.369 v1(76.716,174.662) ; v1(107.94,279.745) 107.94,184.323 108.731,183.533 v1(108.735,183.533) ; v1(128.806,290.105) 130.653,288.258 U6.8
  Bottom Layer w0.6: U16.5 66.583,151.114 74.46,151.114 v1(75.574,152.227) ; v1(76.716,174.662) 77.187,174.662 81.945,179.421 104.624,179.421 v1(108.735,183.533) ; v1(107.94,279.745) 109.957,281.761 120.911,281.761 125.264,286.115 125.948,286.115 126.843,287.01 126.843,288.78 128.168,290.105 v1(128.806,290.105)
U6_11: U6.11 U16.11 | length 187.3
  Top Layer w0.6: U16.11 72.9,162.511 72.9,181.426 73.703,182.229 73.703,185.076 72.717,186.062 72.717,249.834 73.615,250.732 v1(73.615,266.878) ; v1(109.55,265.831) 109.55,284.076 v1(109.567,284.092)
  Bottom Layer w0.6: v1(73.615,266.878) 77.177,270.441 98.919,270.441 104.201,265.159 105.863,265.159 106.535,265.831 v1(109.55,265.831) ; v1(109.567,284.092) 119.297,284.092 U6.11
U7_3: U7.3 U13.4 | length 76.7
  Bottom Layer w0.6: U13.4 54.437,186.213 52.504,186.213 47.449,191.268 47.449,237.758 U7.3
U7_6: U7.6 U13.12 | length 62.6
  Top Layer w0.6: U13.12 68.042,201.026 U7.6
U7_8: U7.8 U14.4 | length 98.1
  Top Layer w0.6: U7.8 69.312,257.361 69.312,186.226 70.87,184.667 v1(70.87,182.434)
  Bottom Layer w0.6: v1(70.87,182.434) 72.056,181.249 86.873,181.249 U14.4
U7_11: U7.11 U14.12 | length 78.9
  Top Layer w0.6: U7.11 64.232,257.361 64.232,233.288 v1(65.966,231.554)
  Bottom Layer w0.6: v1(65.966,231.554) 92.441,205.079 U14.12
U8_3: U8.3 U15.4 | length 84.6
  Bottom Layer w0.6: U8.3 91.552,234.087 87.851,230.386 87.851,216.524 112.044,192.331 112.044,190.753 114.151,188.647 115.285,188.647 117.07,186.862 120.24,186.862 U15.4
U8_6: U8.6 U15.12 | length 80.3
  Top Layer w0.6: U8.6 99.172,238.729 102.165,235.736 v1(102.165,220.81) ; v1(124.262,211.565) 124.262,193 U15.12
  Bottom Layer w0.6: v1(102.165,220.81) 121.016,220.81 121.748,220.079 121.748,214.079 v1(124.262,211.565)
U8_8: U8.8 U16.4 | length 143.5
  Top Layer w0.6: v1(77.613,153.238) 77.613,248.487 78.037,248.911 v1(78.037,252.668)
  Bottom Layer w0.6: U16.4 65.326,152.397 74.602,152.397 75.443,153.238 v1(77.613,153.238) ; v1(78.037,252.668) 82.024,256.655 99.909,256.655 U8.8
U8_11: U8.11 U16.12 | length 145
  Top Layer w0.6: v1(104.624,172.979) 104.526,173.077 104.526,202.139 104.423,202.242 104.423,241.997 105.153,242.728 105.153,256.44 v1(105.148,256.444)
  Bottom Layer w0.6: U16.12 80.828,172.979 v1(104.624,172.979) ; U8.11 95.594,259.96 102.302,259.96 103.795,258.467 103.795,257.211 104.562,256.444 v1(105.148,256.444)
U9_1: ALU_OUT.1 U9.1 U9.4 U9.9 U9.12 U11.1 U11.4 U11.9 U11.12 | length 180.9
  Top Layer w0.6: U11.1 84.059,222.009 U11.12 ; v1(120.516,252.174) 120.62,252.278 U9.12
  Bottom Layer w0.6: ALU_OUT.1 44.947,255.651 58.11,268.814 61.209,268.814 64.793,265.229 80.698,265.229 84.279,268.81 98.279,268.81 103.536,263.553 109.048,263.553 109.85,262.75 120.948,262.75 124.43,259.269 124.43,256.856 ; U11.12 89.176,227.052 U11.12@89.621,227.052 ; U11.4 91.679,225.44 ; U11.9 95.11,225.44 91.679,225.44 ; U9.12 122.268,256.856 124.43,256.856 ; U9.4 121.59,252.174 v1(120.516,252.174) 117.11,252.174 U9.1 114.188,250.604 106.046,242.462 104.887,242.462 104.414,241.988 104.414,241.845 U11.12@89.621,227.052 ; U9.9 126.592,256.856 124.43,256.856 ; U11.12@89.621,227.052 91.233,225.44 91.679,225.44
U10_2: U9.3 U10.2 | length 119.6
  Top Layer w0.6: v1(79.458,207.158) 85.329,213.029 85.329,219.983 86.171,220.825 87.122,220.825 87.869,220.078 87.869,218.332 88.968,217.233 v1(89.702,217.233) ; v1(118.268,236.066) 120.62,238.418 U9.3
  Bottom Layer w0.6: U10.2 54.378,220.063 66.553,220.063 v1(79.458,207.158) ; v1(89.702,217.233) 91.825,217.233 92.949,218.358 92.949,221.225 98.029,226.305 98.029,227.92 98.841,228.732 100.571,228.732 103.966,225.337 118.395,225.337 119.208,226.15 119.208,235.126 v1(118.268,236.066)
U10_3: U10.3 U13.3 | length 40.1
  Top Layer w0.6: U13.3 47.43,190.68 47.43,210.574 U10.3
U10_5: U9.6 U10.5 | length 89.7
  Top Layer w0.6: U10.5 62.13,220.194 v1(62.13,223.579)
  Bottom Layer w0.6: v1(62.13,223.579) 62.684,223.579 64.232,225.127 64.232,230.961 87.069,253.799 94.156,253.799 95.348,252.607 97.298,252.607 97.749,253.057 113.059,253.057 113.24,253.238 125.606,253.238 U9.6
U10_6: U10.6 U13.13 | length 29.3
  Top Layer w0.6: U13.13 62.962,198.486 U10.6
U10_8: U10.8 U14.3 | length 62.2
  Top Layer w0.6: v1(70.185,221.422) 70.185,186.488 72.866,183.807 v1(72.866,182.672)
  Bottom Layer w0.6: U10.8 v1(70.185,221.422) ; v1(72.866,182.672) 73.486,182.052 85.135,182.052 U14.3
U10_10: U9.8 U10.10 | length 86.4
  Bottom Layer w0.6: U10.10 60.422,228.286 86.737,254.601 94.489,254.601 95.681,253.409 96.966,253.409 97.567,254.01 112.877,254.01 112.907,254.041 126.955,254.041 130.78,257.865 U9.8
U10_11: U10.11 U14.13 | length 49.8
  Bottom Layer w0.6: U10.11 61.216,222.771 65.147,222.771 89.901,198.018 U14.13
U10_13: U9.11 U10.13 | length 86.1
  Bottom Layer w0.6: U10.13 55.165,228.469 58.534,228.469 85.702,255.637 112.233,255.637 112.243,255.647 117.433,255.647 119.35,257.564 119.35,259.311 120.101,260.062 121.602,260.062 U9.11
U12_2: U11.3 U12.2 | length 32.9
  Bottom Layer w0.6: U11.3 88.895,218.945 88.895,216.843 89.318,216.42 115.064,216.42 U12.2
U12_3: U12.3 U15.3 | length 43.3
  Top Layer w0.6: U15.3 v1(120.112,187.669)
  Bottom Layer w0.6: v1(120.112,187.669) 118.331,189.449 114.483,189.449 112.847,191.085 112.847,211.663 U12.3
U12_5: U11.6 U12.5 | length 30.8
  Bottom Layer w0.6: U11.6 99.272,221.702 123.15,221.702 U12.5
U12_6: U12.6 U15.13 | length 29.5
  Top Layer w0.6: U15.13 123.455,192.873 123.455,213.516 128.098,218.159 U12.6
U12_8: U12.8 U16.3 | length 144
  Top Layer w0.6: v1(59.152,143.262) U16.3 ; v1(113.652,158.258) 113.652,189.22 v1(114.819,190.386)
  Bottom Layer w0.6: v1(59.152,143.262) 92.365,143.262 107.361,158.258 v1(113.652,158.258) ; v1(114.819,190.386) 113.65,191.555 113.65,198.337 131.987,216.675 131.987,225.564 U12.8
U12_10: U11.8 U12.10 | length 28.3
  Bottom Layer w0.6: U11.8 101.853,224.534 123.178,224.534 U12.10
U12_11: U12.11 U16.13 | length 111.2
  Top Layer w0.6: v1(110.35,183.546) 110.35,191.495 114.715,195.86 117.558,195.86 122.25,200.553 122.25,213.447 124.288,215.484 124.288,222.892 123.018,224.162 U12.11
  Bottom Layer w0.6: U16.13 83.927,178.618 105.422,178.618 v1(110.35,183.546)
U12_13: U11.11 U12.13 | length 28.4
  Bottom Layer w0.6: U11.11 94.133,229.544 115.308,229.544 U12.13
U13_2: U13.2 U14.2 U15.2 U16.2 | length 113.5
  Top Layer w0.6: U13.2 51.293,149.218 53.063,147.447 55.296,147.447 U16.2 ; U14.2 85.887,185.343 v1(85.887,187.598)
  Bottom Layer w0.6: U13.2 52.635,182.934 67.954,182.934 68.261,183.241 71.881,183.241 72.119,183.479 80.034,183.479 80.578,182.934 83.478,182.934 U14.2 ; v1(85.887,187.598) 114.424,187.598 U15.2
U13_14: U13.14 U14.14 U15.14 U16.14 | length 119.6
  Top Layer w0.6: v1(53.833,188.811) U13.14 ; U16.14 69.184,166.415 v1(69.183,185.031) ; U14.14 87.446,191.812 v1@87.446,186.57 ; v1(111.237,191.226) 113.403,193.392 118.789,193.392 U15.14
  Bottom Layer w0.6: v1(53.833,188.811) 54.321,188.322 75.596,188.322 77.364,186.555 ; v1(69.183,185.031) 69.772,185.619 76.428,185.619 77.364,186.555 ; U14.14 88.696,190.562 110.573,190.562 v1(111.237,191.226) ; v1@87.446,186.57 77.378,186.57 77.364,186.555
  other v1: 87.446,186.57
U17_2: LED1.2 U16.9 U17.2 | length 167.2
  Bottom Layer w0.6: LED1.2 42.168,116.186 42.168,145.328 51.802,154.962 70.431,154.962 U16.9 79.43,163.961 126.75,163.961 134.237,156.474 134.237,155.298 133.046,154.107 118.344,154.107 U17.2
U17_3: LED2.2 U16.7 U17.3 | length 107.8
  Top Layer w0.6: LED2.2 64.628,118.237 64.628,144.079 U16.7 v1(69.312,140.205) ; v1@111.728,153.531 115.032,150.227 U17.3
  Bottom Layer w0.6: v1(69.312,140.205) 98.226,140.205 111.552,153.531 v1@111.728,153.531
  other v1: 111.728,153.531
U17_4: LED3.2 U15.9 U17.4 | length 155.2
  Top Layer w0.6: U17.4 118.984,146.843 133.383,146.843 135.098,148.557 135.098,189.784 U15.9
  Bottom Layer w0.6: LED3.2 62.324,108.313 60.47,108.313 55.552,113.231 55.552,121.324 59.409,125.181 85.493,125.181 106.938,146.627 115.943,146.627 U17.4
U17_5: LED4.2 U15.7 U17.5 | length 115
  Bottom Layer w0.6: LED4.2 76.592,114.962 88.424,114.962 108.515,135.053 108.515,136.659 U17.5 124.878,153.021 133.095,153.021 135.04,154.966 135.04,179.682 U15.7
U17_6: LED5.2 U14.9 U17.6 | length 126.7
  Top Layer w0.6: v1(109.323,134.746) 108.407,135.662 108.407,177.902 109.533,179.028 v1(109.533,191.547)
  Bottom Layer w0.6: LED5.2 79.389,109.601 83.568,113.78 88.378,113.78 109.323,134.725 v1(109.323,134.746) 122.652,148.076 U17.6 ; U14.9 109.183,191.897 v1(109.533,191.547)
U17_7: LED6.2 U14.7 U17.7 | length 116.2
  Top Layer w0.6: U14.7 98.324,183.474 98.324,161.603 104.021,155.906 104.021,127.768 v1(102.654,126.401)
  Bottom Layer w0.6: LED6.2 87.615,111.831 102.184,126.401 v1(102.654,126.401) 103.338,126.401 U17.7
U17_8: LED7.2 U13.9 U17.8 | length 154.2
  Top Layer w0.6: v1(80.992,190.041) 80.954,190.003 80.954,179.301 94.854,165.401 LED7.2
  Bottom Layer w0.6: U13.9 79.136,191.897 v1(80.992,190.041) ; LED7.2 127.732,142.225 U17.8
U17_9: LED8.2 U13.7 U17.9 | length 160.3
  Top Layer w0.6: v1@63.616,181.851 63.616,183.9 U13.7 ; v1(97.12,180.229) 97.12,159.644 100.69,156.074 100.69,110.623 LED8.2
  Bottom Layer w0.6: v1@63.616,181.851 65.238,180.229 v1(97.12,180.229) ; LED8.2 101.966,111.895 130.272,140.201 U17.9
  other v1: 63.616,181.851
U17_11: BUS1.1 U17.11 | length 100.1
  Bottom Layer w0.6: BUS1.1 44.947,144.272 54.717,154.041 73.976,154.041 83.093,163.158 125.528,163.158 U17.11
U17_12: BUS1.2 U17.12 | length 98
  Bottom Layer w0.6: BUS1.2 55.052,153.238 74.308,153.238 83.426,162.356 123.791,162.356 U17.12
U17_13: BUS1.3 U17.13 | length 95.8
  Bottom Layer w0.6: BUS1.3 50.845,146.491 91.054,146.491 106.115,161.553 122.054,161.553 U17.13
U17_14: BUS1.4 U17.14 | length 93.6
  Bottom Layer w0.6: BUS1.4 52.582,145.688 91.386,145.688 106.447,160.75 120.317,160.75 U17.14
U17_15: BUS2.1 U17.15 | length 91.7
  Bottom Layer w0.6: BUS2.1 44.947,133.604 56.229,144.885 91.718,144.885 106.779,159.947 118.58,159.947 U17.15
U17_16: BUS2.2 U17.16 | length 89.6
  Bottom Layer w0.6: BUS2.2 56.564,144.082 92.05,144.082 107.112,159.144 116.843,159.144 U17.16
U17_17: BUS2.3 U17.17 | length 86.6
  Bottom Layer w0.6: BUS2.3 57.038,142.016 92.983,142.016 108.361,157.395 116.052,157.395 U17.17
U17_18: BUS2.4 U17.18 | length 84
  Bottom Layer w0.6: BUS2.4 43.611,126.049 85.206,126.049 111.88,152.724 112.063,152.724 115.032,155.693 U17.18
U17_19: ALU_OUT1.1 U17.19 | length 192.1
  Top Layer w0.6: ALU_OUT1.1 44.851,264.887 44.851,153.742 v1(57.587,141.006)
  Bottom Layer w0.6: v1(57.587,141.006) 57.594,141.012 97.629,141.012 U17.19
U26_3: ALU_OUT1.3
U26_4: ALU_OUT1.4
U28_2: ALU_OUT.2
U28_3: ALU_OUT.3
U28_4: ALU_OUT.4

## Silkscreen, mask and mechanical layers (free items; w line width, h text height)
Top Overlay:
  text "acc_b8" at 109.397,327.991 h1.14 r275
  text "acc_b7" at 112.064,327.991 h1.14 r275
  text "acc_b6" at 114.604,327.991 h1.14 r275
  text "acc_b5" at 116.89,327.991 h1.14 r275
  text "acc_b4" at 120.065,327.991 h1.14 r275
  text "acc_b3" at 122.732,327.991 h1.14 r275
  text "acc_b2" at 125.272,327.991 h1.14 r275
  text "acc_b0" at 127.558,327.864 h1.14 r275
  text "ALU" at 80.249,326.859 h4.14
  text "+5VCC" at 46.975,318.072 h1.14
  text "+5VCC LOOP" at 46.975,316.166 h1.14
  text "GND" at 47.102,312.864 h1.14
  text "GND LOOP" at 47.102,310.578 h1.14
  text "ALU_OUT" at 46.848,264.858 h1.14
  text "ADD_SUB" at 46.848,262.445 h1.14
  text "XOR_NOT" at 46.848,254.317 h1.14
  text "BUS0" at 46.848,143.065 h1.14
  text "BUS1" at 46.848,140.779 h1.14
  text "BUS2" at 46.848,138.239 h1.14
  text "BUS3" at 46.848,135.572 h1.14
  text "BUS4" at 46.848,132.524 h1.14
  text "BUS5" at 46.848,130.238 h1.14
  text "BUS6" at 46.848,127.698 h1.14
  text "BUS7" at 46.848,125.031 h1.14
  text "b_reg_b0" at 111.427,113.157 h1.14 r90
  text "b_reg_b1" at 113.713,113.157 h1.14 r90
  text "b_reg_b2" at 116.253,113.157 h1.14 r90
  text "b_reg_b3" at 118.92,113.157 h1.14 r90
  text "b_reg_b4" at 122.095,113.157 h1.14 r90
  text "b_reg_b5" at 124.381,113.157 h1.14 r90
  text "b_reg_b6" at 126.921,113.157 h1.14 r90
  text "b_reg_b7" at 129.588,113.157 h1.14 r90